# Altium PCB PCIe2HAT.PcbDoc
Units mil, origin at the board's own origin, x right, y up, seen from the top; angles counter-clockwise.
Board outline 3162.2 x 1103.26 mil, 4 copper layers (L01-TOP, L02-GND, L03-GND, L10-BOT), stack 17.5 mil thick; 30 components, 23 nets, 143 pads, 163 vias.
Unrouted connection lines stored in the file: 76.
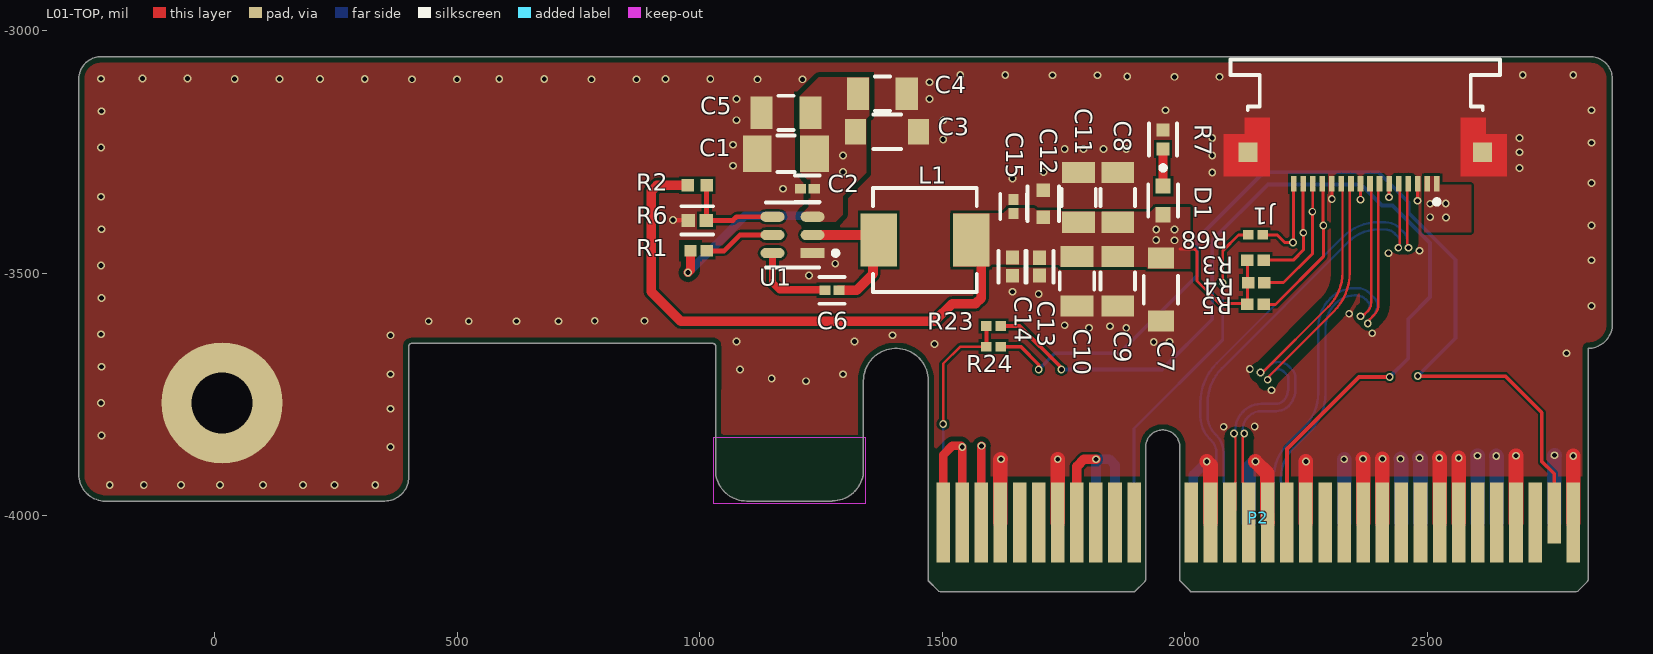
[diagram p0: L01-TOP view]
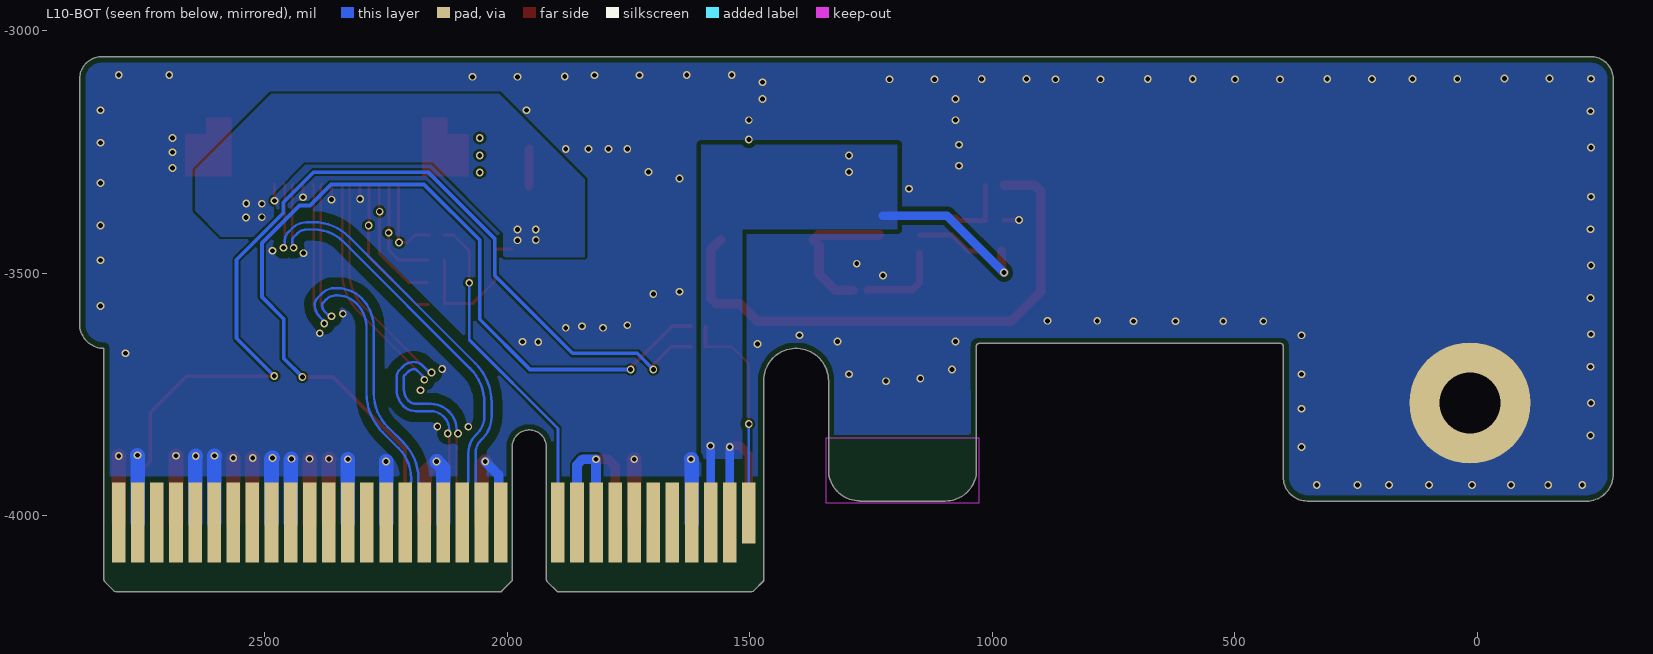
[diagram p1: L10-BOT view, seen from below]
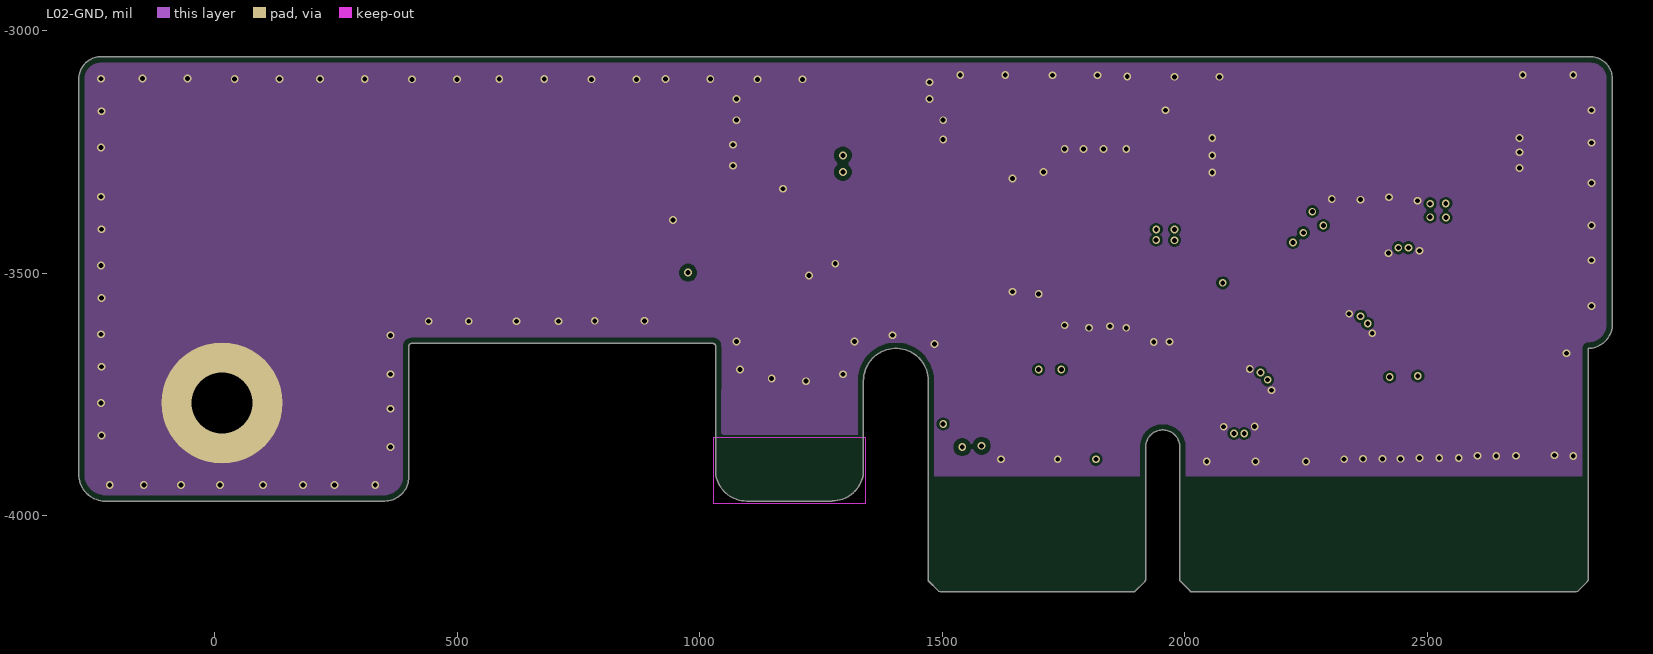
[diagram p2: L02-GND]
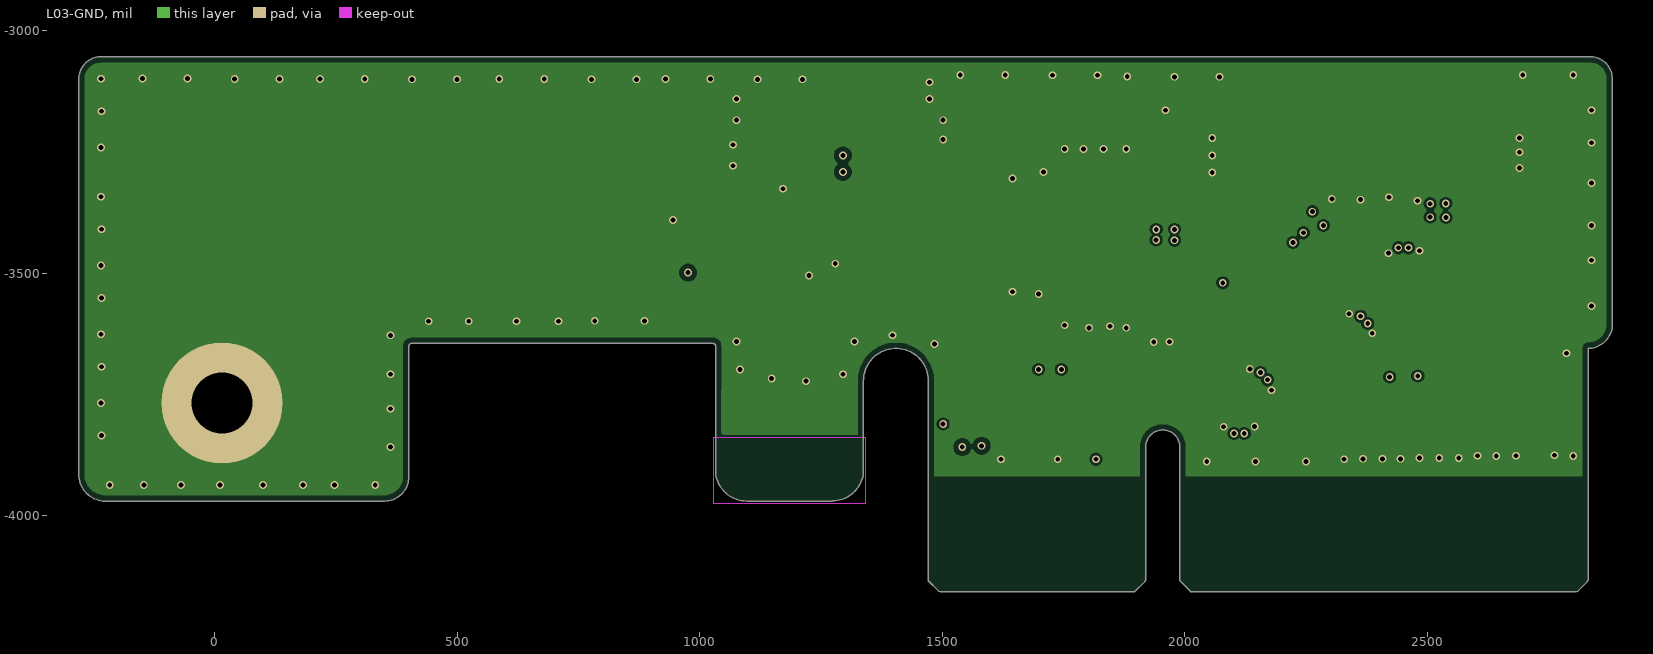
[diagram p3: L03-GND]
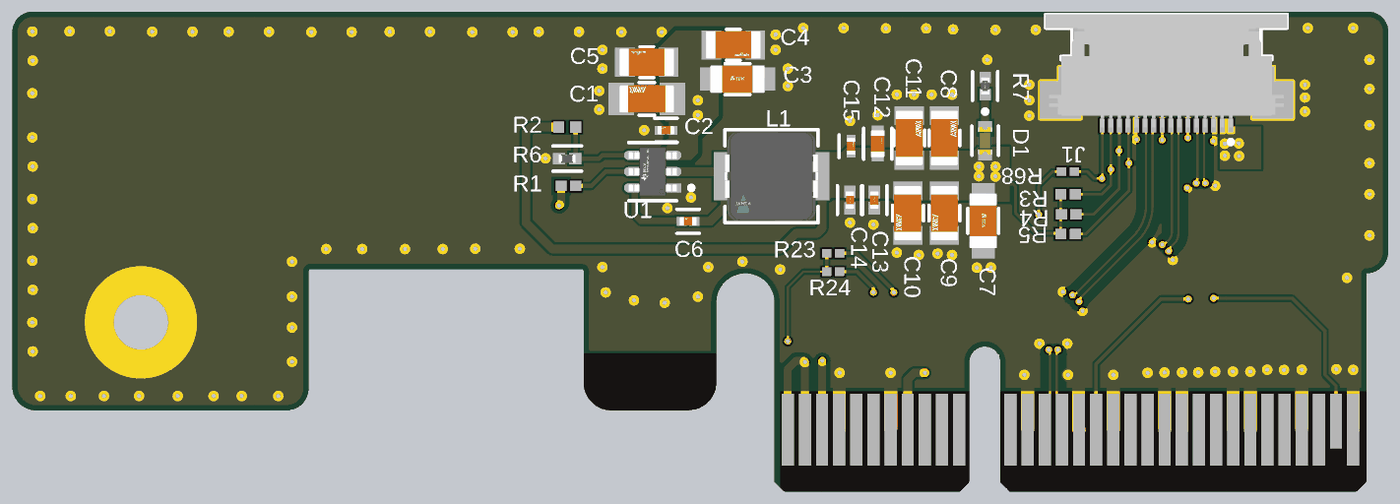
[diagram p4: 3D render of the assembled board from above, using the file's embedded part models]

## Layer stack, top to bottom
Top Solder: solder mask 0.4, Solder Resist, Dk 3.5
L01-TOP: signal copper 0.6
Dielectric 1: prepreg 3.9, FR-4, Dk 4.29
L02-GND: signal copper 0.6
Dielectric3: prepreg 7.3, FR-4, Dk 4.29
L03-GND: signal copper 0.6
Dielectric2: dielectric 3.9, FR-4, Dk 4.8
L10-BOT: signal copper 0.6
Board Layer Stack Bottom Solder: solder mask 0.4, Solder Resist, Dk 3.5

## Board outline
-230.43,-3969.9 350.12,-3969.9 ccw(c350.12,-3919.9) 400.12,-3919.9 400.12,-3650.09 cw(c405.12,-3650.09) 405.12,-3645.09 1027.56,-3645.09 cw(c1027.56,-3650.09) 1032.56,-3650.09 1032.56,-3905.99 1032.44,-3905.99 ccw(c1096.47,-3905.99) 1096.47,-3970.02 1096.47,-3969.9 1273.49,-3969.9 1273.49,-3969.54 ccw(c1273.49,-3905.51) 1337.52,-3905.51 1337.52,-3721.94 cw(c1404.42,-3721.94) 1471.31,-3721.94 1471.22,-3721.98 1471.22,-4134.45 1492.37,-4155.6 1495.9,-4157.06 1896.55,-4157.06 1917.7,-4135.91 1919.18,-4132.36 1919.18,-3858.74 cw(c1954.58,-3858.74) 1989.98,-3858.74 1989.98,-4134.43 2011.12,-4155.56 2011.65,-4157.06 2806.93,-4157.06 2810.48,-4155.58 2830.15,-4135.91 2831.61,-4132.38 2831.61,-3655.09 ccw(c2831.61,-3605.09) 2881.61,-3605.1 2881.61,-3098.8 ccw(c2835.77,-3099.64) 2834.93,-3053.8 -234.59,-3053.8 -233.75,-3053.8 ccw(c-234.59,-3099.64) -280.43,-3098.8 -280.43,-3909.9 ccw(c-225.43,-3914.9)

## Design rules (kind name [scope] priority, off if disabled: settings)
BoardOutlineClearance [All] p1: gap=12 ignorepadtopadclearanceinfootprint=FALSE
Clearance Clearance_12V [InNet('+12V') OR InNet('+12V_PCIE')] p1: gap=10 ignorepadtopadclearanceinfootprint=TRUE
Clearance DiffPairClearance [(InDifferentialPairClass('All Differential Pairs'))] p2: gap=5 ignorepadtopadclearanceinfootprint=TRUE except(20: Arc-Fill Arc-Poly Arc-Region Track-Fill Track-Poly Track-Region)
Clearance Clearance_PCIE [InDifferentialPairClass('PCIE')] p3: gap=5 ignorepadtopadclearanceinfootprint=FALSE
Clearance [All] p4: gap=5 ignorepadtopadclearanceinfootprint=TRUE
ComponentClearance [All] p1: gap=10 collisioncheckmode=3 verticalgap=2 showdistances=FALSE
DiffPairsRouting DiffPair_100ohm [InDifferentialPairClass('All Differential Pairs')] p1: maxlimit=10 minlimit=5 mostfreqgap=10 toplayer_mingap=10 toplayer_minwidth=5 toplayer_maxwidth=5 toplayer_prefwidth=5 bottomlayer_mingap=10 bottomlayer_minwidth=5 bottomlayer_maxwidth=5 bottomlayer_prefwidth=5 impedanceprofiledriven=TRUE impedanceprofileid={54E60DE2-01EA-496C-94D2-6AE08175C5F2} impedanceprofilevalue=100.000000 maxuncoupledlength=500
HoleSize [All] p1: absolutevalues=TRUE maxlimit=1000 minlimit=8 maxpercent=80.000 minpercent=20.000
MatchedLengths SFP_TX_RX [InNetClass('SFP_TX_RX')] p1: tolerance=3 checknetsindiffpair=FALSE checkdiffpairvsdiffpair=TRUE checkxsignals=TRUE checkothers=TRUE
MatchedLengths SMA_Length1 [InNetClass('SMA_Length1')] p2: tolerance=3 checknetsindiffpair=FALSE checkdiffpairvsdiffpair=TRUE checkxsignals=TRUE checkothers=TRUE
MatchedLengths SMA_Length2 [InNetClass('SMA_Length2')] p3: tolerance=3 checknetsindiffpair=FALSE checkdiffpairvsdiffpair=TRUE checkxsignals=TRUE checkothers=TRUE
MatchedLengths SMA_Short [InNetClass('SMA_Short')] p4: tolerance=3 checknetsindiffpair=FALSE checkdiffpairvsdiffpair=TRUE checkxsignals=TRUE checkothers=TRUE
MatchedLengths Loopbacks_TX [InNetClass('Loopbacks_TX')] p5: tolerance=3 checknetsindiffpair=FALSE checkdiffpairvsdiffpair=TRUE checkxsignals=TRUE checkothers=TRUE
MatchedLengths Loopbacks_RX [InNetClass('Loopbacks_RX')] p6: tolerance=3 checknetsindiffpair=FALSE checkdiffpairvsdiffpair=TRUE checkxsignals=TRUE checkothers=TRUE
MatchedLengths DPLL_SFP_TX_RX [InNetClass('DPLL_SFP_TX_RX')] p7: tolerance=3 checknetsindiffpair=FALSE checkdiffpairvsdiffpair=TRUE checkxsignals=TRUE checkothers=TRUE
MatchedLengths DPLL_SMA [InNetClass('DPLL_SMA')] p8: tolerance=3 checknetsindiffpair=FALSE checkdiffpairvsdiffpair=TRUE checkxsignals=TRUE checkothers=TRUE
MinimumSolderMaskSliver [All] p1 off: minsoldermaskwidth=1
PolygonConnect ATX_12V [InComponent('J38')] p1: connectstyle=Relief reliefconductorwidth=40 reliefentries=4 polygonreliefangle="90 Angle" airgapwidth=8
PolygonConnect SMA_GND_1 [(InComponent('J5') OR InComponent('J7') OR InComponent('J13') OR InComponent('AN1') OR InComponent('AN2') OR InComponent('P1')OR InComponent('J9')OR InComponent('P3')OR InComponent('J10')OR InComponent('J11')OR InComponent('J12') OR InComponent('J16') OR InComponent('J17') OR InComponent('J18') OR InComponent('P7'))] p2: connectstyle=Relief reliefconductorwidth=15 reliefentries=4 polygonreliefangle="90 Angle" airgapwidth=10
PolygonConnect [All] p3: connectstyle=Direct reliefconductorwidth=15 reliefentries=4 polygonreliefangle="90 Angle" airgapwidth=8
RoutingVias [All] p1: holewidth=10 width=16 viastyle="Through Hole" minholewidth=8 minwidth=16 maxholewidth=28 maxwidth=50
SilkToSolderMaskClearance [IsPad] p1 off: minsilkscreentomaskgap=10 clearancetoexposedcopper=TRUE
SolderMaskExpansion [All] p1: expansion=4 istentingtop=FALSE
Width [All] p1: maxlimit=80 minlimit=3 preferedwidth=8 toplayer_minwidth=4 toplayer_maxwidth=40 toplayer_prefwidth=6 bottomlayer_minwidth=4 bottomlayer_maxwidth=40 bottomlayer_prefwidth=6 impedanceprofiledriven=TRUE impedanceprofileid={01EEFB83-325C-4167-8E9D-E60E7E24A12D} impedanceprofilevalue=50.000000 minimp=50.000000 maximp=50.000000 favimp=50.000000
25 further rules are at their usual default settings.

## Classes and differential pairs
differential pair PCIE_PI_GF_0: +PCIE_PI_GF_0_P -PCIE_PI_GF_0_N
differential pair PCIE_GF_PI_0: +PCIE_GF_PI_0_P -PCIE_GF_PI_0_N
differential pair PCIE_CLK: +PCIE_CLK_P -PCIE_CLK_N

## Components (designator, comment, footprint, x,y, rotation, side; value= is the part's Value field where it differs from the comment)
C1 "10uF_25V_1206" FP-1206-L_3_2_0_2-W_1_6_0-IPC_A 1177.66,-3254.02 r180 top
C2 "0.1uF_25V_0402" FP-0402-L_1_0_1-W_0_5_0_1-IPC_C 1221.68,-3326.09 r180 top
C3 "47uF_25V_1206" FP-C3216-160-0_2-MFG 1386.05,-3208.66 r0 top
C4 "4.7uF_50V_1206" FP-GRM31C-0_2-e0_3_0_8-IPC_C 1376.53,-3129.92 r0 top
C5 "4.7uF_50V_1206" FP-GRM31C-0_2-e0_3_0_8-IPC_C 1177.66,-3169.63 r180 top
C6 "0.1uF_25V_0402" FP-0402-L_1_0_1-W_0_5_0_1-IPC_C 1272.49,-3535.44 r180 top
C7 "47uF_16V_1206" FP-C3216-160-0_2-MFG 1950.69,-3534.26 r270 top
C8 "22uF_6.3V_1206" FP-1206-L_3_2_0_2-W_1_6_0-IPC_C 1861.69,-3343.9 r90 top
C9 "22uF_6.3V_1206" FP-1206-L_3_2_0_2-W_1_6_0-IPC_C 1861.69,-3516.6 r270 top
C10 "22uF_6.3V_1206" FP-1206-L_3_2_0_2-W_1_6_0-IPC_C 1777.73,-3516.6 r270 top
C11 "22uF_6.3V_1206" FP-1206-L_3_2_0_2-W_1_6_0-IPC_C 1780.92,-3343.9 r90 top
C12 "10uF_16V_0603" FP-0603-L_1_6_0_2-W_0_8_0-MFG 1708.49,-3357.03 r90 top
C13 "2.2uF_16V_0402" FP-C1005-050-0_05-IPC_A 1700.47,-3486.66 r270 top
C14 "1uF_16V_0402" FP-0402-L_1_0_0_05-W_0_5-IPC_A 1644.67,-3486.66 r270 top
C15 "0.1uF_25V_0402" FP-0402-L_1_0_1-W_0_5_0_1-IPC_C 1647.1,-3362.9 r90 top
D1 "LTST-C191KGKT" FP-LTST-C191KGKT-MFG 1955.27,-3350.09 r270 top
J1 "52746-1671" MOLX-52746-1671 2372.11,-3283.27 r180 top locked
L1 "IHLP2020CZER3R3M11" FP-IHLP-2020CZ-FP_1_905x2-MFG 1464.25,-3431.74 r180 top
P2 "PCIex4" PCIE_4LANE_EDGE 2151.41,-3907.03 r0 top
R1 "4.7K_1%_0402" RESC1005X40X25NL10T10 997.54,-3454.14 r180 top
R2 "54.9K_1%_0402" RESC1005X40X25ML05T05 994.7,-3318.9 r180 top
R3 "4.7K_1%_0402" RESC1005X40X25NL10T10 2145.73,-3473.32 r180 top
R4 "4.7K_1%_0402" RESC1005X40X25NL10T10 2147.33,-3519.58 r180 top
R5 "4.7K_1%_0402" RESC1005X40X25NL10T10 2145.73,-3564.52 r180 top
R6 "10K_1%_0402" FP-ERJU02-IPC_A 994.7,-3391.27 r0 top
R7 "200_1%_0402" FP-ERJ2RK-IPC_A 1955.27,-3224.41 r270 top
R23 "0_5%_0402" RESC1005X40X25LL10T10 1605.92,-3609.06 r0 top
R24 "0_5%_0402" RESC1005X40X25LL10T10 1605.92,-3651.41 r0 top
R68 "0_5%_0402" RESC1005X40X25LL10T10 2145.73,-3421.26 r0 top
U1 "TPS564208DDCT" FP-DDC0006A-IPC_C 1191.31,-3421.26 r180 top

## Footprints (in the part's own frame and the unit in brackets; to place one, negate y for a bottom-side part, rotate by r counter-clockwise, add the part's x,y. Pads: shape width x height; smd on the part's side, far side on the other; paste and mask are expansions set on the pad)
FP-0402-L_1_0_0_05-W_0_5-IPC_A [mil]
  rect 28.16x26.48 smd paste+0 mask+0: 1(-18.84,0) 2(18.84,0)
  silkscreen extent -33,-29 33,29, body extent -20,-10 20,10, height 22
FP-0402-L_1_0_1-W_0_5_0_1-IPC_C [mil]
  rect 22.88x20.16 smd paste+0 mask+0: 1(-14.39,0) 2(14.39,0)
  silkscreen extent -26,-28 26,28, body extent -30,-16 30,16, height 10
FP-0603-L_1_6_0_2-W_0_8_0-MFG [mm]
  rect 0.7x0.7 smd paste+0 mask+0: 1(-0.7,0) 2(0.7,0)
  silkscreen extent -0.9,-0.82 0.9,0.82, body extent -1.15,-0.6 1.15,0.6, height 0.25
FP-1206-L_3_2_0_2-W_1_6_0-IPC_A [mil]
  rect 59.24x75.05 smd paste+0 mask+0: 1(-59.09,0) 2(59.09,0)
  silkscreen extent -18,-38 18,38, body extent -108,-57 108,57, height 10
FP-1206-L_3_2_0_2-W_1_6_0-IPC_C [mil]
  rect 43.49x67.17 smd paste+0 mask+0: 1(-51.21,0) 2(51.21,0)
  silkscreen extent -18,-35 18,35, body extent -63,-31 63,31, height 90
FP-C1005-050-0_05-IPC_A [mil]
  rect 29.11x26.48 smd paste+0 mask+0: 1(-18.37,0) 2(18.37,0)
  silkscreen extent -33,-29 33,29, body extent -20,-10 20,10, height 22
FP-C3216-160-0_2-MFG [mm]
  rect 1.1x1.35 smd paste+0 mask+0: 1(-1.65,0) 2(1.65,0)
  silkscreen extent -0.72,-0.9 0.72,0.9, body extent -2.3,-1 2.3,1, height 0.25
FP-DDC0006A-IPC_C [mm]
  rect 1.254x0.532 smd paste+0 mask+0: 1(-1.05,0.95)
  rrect100% 1.254x0.532 smd paste+0 mask+0: 2(-1.05,0) 3(-1.05,-0.95) 4(1.05,-0.95) 5(1.05,0) 6(1.05,0.95)
  silkscreen extent -2.38,-1.7 1.4,1.7, body extent -1.4,-1.45 1.4,1.45, height 1.1
FP-ERJ2RK-IPC_A [mil]
  rect 26.31x26.48 smd paste+0 mask+0: 1(-19.77,0) 2(19.77,0)
  silkscreen extent -33,-29 33,29, body extent -41,-21 41,21, height 10
FP-ERJU02-IPC_A [mil]
  rect 28.16x26.48 smd paste+0 mask+0: 1(-18.84,0) 2(18.84,0)
  silkscreen extent -33,-29 33,29, body extent -20,-10 20,10, height 16
FP-GRM31C-0_2-e0_3_0_8-IPC_C [mil]
  rect 45.46x67.17 smd paste+0 mask+0: 1(-50.23,0) 2(50.23,0)
  silkscreen extent -16,-35 16,35, body extent -77,-39 77,39, height 10
FP-IHLP-2020CZ-FP_1_905x2-MFG [mm]
  rect 1.905x2.79 smd paste+0 mask+0: 1(-2.425,0) 2(2.425,0)
  silkscreen extent -2.72,-2.72 2.72,2.72, body extent -3.48,-2.82 3.48,2.82, height 0.25
FP-LTST-C191KGKT-MFG [mm]
  rect 0.8x0.8 smd paste+0 mask+0: 1(-0.75,0) 2(0.75,0)
  silkscreen extent -1.82,-0.77 0.85,0.77, body extent -1.25,-0.55 1.25,0.55, height 0.25
MOLX-52746-1671 [mm] "FPC Connector, 16-Leads, Right Angle, Pitch 0.5 mm, Mated Height 2.0 mm, SMT"
  rect 0.3x0.8 smd: 1(-3.75,0.824) 2(-3.25,0.824) 3(-2.75,0.824) 4(-2.25,0.824) 5(-1.75,0.824) 6(-1.25,0.824) 7(-0.75,0.824) 8(-0.25,0.824) 9(0.25,0.824) 10(0.75,0.824) 11(1.25,0.824) 12(1.75,0.824) 13(2.25,0.824) 14(2.75,0.824) 15(3.25,0.824) 16(3.75,0.824)
  rect 1x1 smd: MP1(-6.134,-0.824) MP2(6.134,-0.824)
  L01-TOP region: -7.4,0.424 -5,0.424 -5,-2.626 -5,-2.626 -6.3,-2.626 -6.3,-1.777 -6.3,-1.776 -7.4,-1.776
  L01-TOP region: 5,0.424 7.4,0.424 7.4,-1.776 7.4,-1.777 6.3,-1.777 6.3,-2.626 5,-2.626 5,0.424
  silkscreen extent -7.05,-5.68 7.05,1.9, body extent -7.05,-5.68 7.05,0.92, height 2.01
PCIE_4LANE_EDGE [mil] "PCIE_4LANE_EDGE"
  rect 28x126 smd far side: A1(-649.6,-87.74)
  rect 28x165 smd far side: A2(-610.23,-107.24) A3(-570.86,-107.24) A4(-531.49,-107.24) A5(-492.12,-107.24) A6(-452.75,-107.24) A7(-413.38,-107.24) A8(-374.01,-107.24) A9(-334.64,-107.24) A10(-295.27,-107.24) A11(-255.9,-107.24) A12(-137.79,-107.24) A13(-98.42,-107.24) A14(-59.05,-107.24) A15(-19.68,-107.24) A16(19.69,-107.24) A17(59.06,-107.24) A18(98.43,-107.24) A19(137.8,-107.24) A20(177.17,-107.24) A21(216.54,-107.24) A22(255.91,-107.24) A23(295.28,-107.24) A24(334.65,-107.24) A25(374.02,-107.24) A26(413.39,-107.24) A27(452.76,-107.24) A28(492.13,-107.24) A29(531.5,-107.24) A30(570.87,-107.24) A31(610.24,-107.24) A32(649.61,-107.24)
  rect 28x165 smd: B1(-649.6,-107.24) B2(-610.23,-107.24) B3(-570.86,-107.24) B4(-531.49,-107.24) B5(-492.12,-107.24) B6(-452.75,-107.24) B7(-413.38,-107.24) B8(-374.01,-107.24) B9(-334.64,-107.24) B10(-295.27,-107.24) B11(-255.9,-107.24) B12(-137.79,-107.24) B13(-98.42,-107.24) B14(-59.05,-107.24) B15(-19.68,-107.24) B16(19.69,-107.24) B17(59.06,-107.24) B18(98.43,-107.24) B19(137.8,-107.24) B20(177.17,-107.24) B21(216.54,-107.24) B22(255.91,-107.24) B23(295.28,-107.24) B24(334.65,-107.24) B25(374.02,-107.24) B26(413.39,-107.24) B27(452.76,-107.24) B28(492.13,-107.24) B29(531.5,-107.24) B30(570.87,-107.24) B32(649.61,-107.24)
  rect 28x126 smd: B31(610.24,-87.74)
RESC1005X40X25LL10T10 [mm] "Chip Resistor, 2-Leads, Body 1.00x0.50mm, IPC High Density"
  rect 0.55x0.5 smd: 1(-0.375,0) 2(0.375,0)
  body extent -0.55,-0.3 0.55,0.3, height 0.4
RESC1005X40X25ML05T05 [mm] "Chip Resistor, 2-Leads, Body 1.00x0.50mm, IPC Low Density"
  rect 0.65x0.65 smd: 1(-0.5,0) 2(0.5,0)
  body extent -0.53,-0.27 0.53,0.28, height 0.4
RESC1005X40X25NL10T10 [mm] "Chip Resistor, 2-Leads, Body 1.00x0.50mm, IPC Medium Density"
  rect 0.65x0.6 smd: 1(-0.425,0) 2(0.425,0)
  body extent -0.55,-0.3 0.55,0.3, height 0.4

## Part data
C1: library part CMP-04427-006943-1, "General Purpose Ceramic Capacitor, 1206, 10uF, 20%, X5R, 15%, 25V", Capacitance=10uF, Case Code (Imperial)=1206, Case Code (Metric)=3216, Dielectric=X5R, Insulation Resistance=10GR, Max Operating Temperature=85°C, Min Operating Temperature=-55°C, Package Quantity=1, Tolerance=20%, Voltage Rating=25V, Case/Package=1206, Construction=Flat, Contact Plating=Tin, Depth=1.6mm, Dissipation Factor=12.5%, Height=0.07mm, Lead Free="Lead Free", Length=3.2mm, Mount="Surface Mount", Number of Pins=2, Packaging="Tape and Reel", Radiation Hardening=No, REACH SVHC="No SVHC", RoHS Compliant=Yes, Series=-, Termination=SMD/SMT, Thickness=0.07inch, Voltage Rating (DC)=25V, Width=1.6mm
C2 C6 C15: library part CMP-2008-02519-2, "General Purpose Ceramic Capacitor, 0402, 100nF, 10%, X7R, 15%, 25V", Capacitance=100nF, Case Code (Imperial)=0402, Case Code (Metric)=1005, Dielectric=X7R, Max Operating Temperature=125°C, Min Operating Temperature=-55°C, Package Quantity=1, Tolerance=10%, Voltage=25V, Case/Package=0402, Construction=Flat, Depth=0.5mm, Lead Free="Lead Free", Length=1mm, Mount="Surface Mount", Number of Pins=2, Packaging="Tape and Reel", Radiation Hardening=No, REACH SVHC="No SVHC", RoHS Compliant=Yes, Series=-, Termination=SMD/SMT, Thickness=0.022inch, Voltage Rating=25V, Voltage Rating (DC)=25V, Width=0.02inch
C3: library part CMP-2000-05397-3, "Multilayer Ceramic Capacitors 47uF ±20% 25V X5R SMD 1206", Capacitance=47uF, Case Code (Imperial)=1206, Case Code (Metric)=3216, Dielectric=X5R, Dielectric Material=Ceramic, Max Operating Temperature=85°C, Min Operating Temperature=-55°C, Package Quantity=1, Tolerance=20%, Voltage=25V, Case/Package=1206, Depth=1.6mm, Height=1.6mm, Lead Free="Lead Free", Length=0.126inch, Mount="Surface Mount", Packaging="Tape and Reel", REACH SVHC="No SVHC", Resistor Type=Ceramic, RoHS Compliant=Yes, Series=C, Termination=SMD/SMT, Thickness=0.071inch, Voltage Rating=25V, Voltage Rating (DC)=25V, Weight=0.000571oz, Width=0.063inch
C4 C5: library part CMP-1037-04923-3, "Chip Multilayer Ceramic Capacitors for General Purpose, 1206, 4.7uF, X7R, 15%, 10%, 50V", Capacitance=4.7uF, Case Code (Imperial)=1206, Case Code (Metric)=3216, Dielectric=X7R, Max Operating Temperature=125°C, Min Operating Temperature=-55°C, Package Quantity=2000, Tolerance=10%, Voltage=50V, Case/Package=1206, Depth=1.6mm, Height=1.6mm, Lead Free="Lead Free", Length=3.2mm, Material=Ceramic, Mount="Surface Mount", Packaging="Tape and Reel", Radiation Hardening=No, REACH SVHC="No SVHC", Termination=SMD/SMT, Thickness=0.071inch, Voltage Rating=50V, Voltage Rating (DC)=50V, Width=0.063inch
C7: library part CMP-2000-07442-2, "Multilayer Ceramic Capacitors 47uF ±20% 16V X5R SMD 1206", Capacitance=47uF, Case Code (Imperial)=1206, Case Code (Metric)=3216, Dielectric=X5R, Dielectric Material=Ceramic, Max Operating Temperature=85°C, Min Operating Temperature=-55°C, Package Quantity=1, Tolerance=20%, Voltage Rating=16V, Case/Package=1206, Construction=Flat, Depth=1.6mm, Height=1.6mm, Lead Free="Lead Free", Length=3.2mm, Mount="Surface Mount", Packaging="Tape and Reel", Radiation Hardening=No, REACH SVHC="No SVHC", Resistor Type=Ceramic, RoHS Compliant=Yes, Series=C, Termination=SMD/SMT, Thickness=0.071inch, Voltage Rating (DC)=16V, Weight=0.000571oz, Width=0.063inch
C8 C9 C10 C11: library part CMP-2000-05869-2, "General Purpose Ceramic Capacitor, 1206, 22uF, 20%, X5R, 15%, 6.3V", Capacitance=22uF, Case Code (Imperial)=1206, Case Code (Metric)=3216, Dielectric=X5R, Max Operating Temperature=85°C, Min Operating Temperature=-55°C, Package Quantity=1, Tolerance=20%, Voltage=6.3V, Case/Package=1206, Construction=Flat, Contact Plating=Tin, Depth=1.6mm, Height=0.07mm, Lead Free="Lead Free", Length=3.2mm, Mount="Surface Mount", Number of Pins=2, Packaging="Tape and Reel", Radiation Hardening=No, REACH SVHC="No SVHC", RoHS Compliant=Yes, Series=-, Termination=SMD/SMT, Thickness=0.07inch, Voltage Rating=6.3V, Voltage Rating (DC)=6.3V, Width=0.063inch
C12: library part CMP-2000-06226-4, "Multilayer Ceramic Capacitor 10uF 16V X5R 20% SMD 0603 T/R", Capacitance=10uF, Case Code (Imperial)=0603, Case Code (Metric)=1608, Dielectric=X5R, Max Operating Temperature=85°C, Min Operating Temperature=-55°C, Package Quantity=1, Tolerance=20%, Voltage Rating=16V, Case/Package=0603, Construction=Flat, Halogen Free="Halogen Free", Height=0.8mm, Length=0.063inch, Mount="Surface Mount", Packaging="Tape and Reel", RoHS Compliant=Yes, Series=M, Termination=SMD/SMT, Thickness=0.031inch, Voltage Rating (DC)=16V, Width=0.031inch
C13: library part CMP-2000-05998-2, "Multilayer Ceramic Capacitors 2.2μF ±10% 16V X5R SMD 0402", Capacitance=2.2uF, Case Code (Imperial)=0402, Case Code (Metric)=1005, Dielectric=X5R, Dielectric Material=Ceramic, Max Operating Temperature=85°C, Min Operating Temperature=-55°C, Package Quantity=1, Tolerance=10%, Voltage Rating=16V, Case/Package=0402, Depth=0.5mm, Height=0.5mm, Lead Free="Lead Free", Length=1mm, Mount="Surface Mount", Packaging="Tape and Reel", REACH SVHC="No SVHC", Resistor Type=Ceramic, RoHS Compliant=Yes, Series=C, Termination=SMD/SMT, Thickness=0.022inch, Voltage Rating (DC)=16V, Weight=2.3E-05oz, Width=0.02inch
C14: library part CMP-14477-000104-2, "None", Capacitance=1uF, Case Code (Imperial)=0402, Case Code (Metric)=1005, Dielectric=X5R, Max Operating Temperature=85°C, Min Operating Temperature=-55°C, Package Quantity=1, Tolerance=10%, Voltage Rating=16V, Case/Package=0402, Construction=Flat, Depth=0.5mm, Halogen Free="Halogen Free", Height=0.5mm, Length=1mm, Mount="Surface Mount", Number of Pins=2, Packaging="Tape and Reel", Radiation Hardening=No, RoHS Compliant=Yes, Series=M, Termination=SMD/SMT, Thickness=0.022inch, Voltage Rating (DC)=16V, Width=0.02inch
D1: library part CMP-2000-05198-2, "LED GREEN CLEAR SMD", Case Code (Imperial)=0603, Case Code (Metric)=1608, Color=Green, Forward Current=30mA, Forward Voltage=2V, Lens Color=Colorless, Max Operating Temperature=85°C, Max Power Dissipation=75mW, Min Operating Temperature=-55°C, Package Quantity=1, Reverse Voltage=5V, Test Current=20mA, Case/Package=0603, Depth=0.8mm, Dominant Wavelength=571nm, Height=0.55mm, Illumination Color=Green, Lead Free="Lead Free", Length=1.6mm, Lens Style=Rectangular, Lens Transparency=Clear, Luminous Intensity=35mcd, Mount="Surface Mount", Number of Elements=1, Number of LEDs=1, Number of Pins=2, Packaging="Tape and Reel", Power Dissipation=75mW, Power Rating=75mW, Radiation Hardening=No, Viewing Angle=130°, Wavelength=574nm, Width=0.8mm
J1: library part CMP-1241-00378-1, "0.5 mm Pitch Easy-On(TM) Type FPC Connector, 2.0 mm Mated Height, Right Angle, ZIF, SMT, Bottom Contact, 16 Circuits, -20 to 85 degC, ELV and RoHS Compliant, Tape and Reel", Current (Max per Contact)=0.5A, Manufacturer=Molex, Voltage (Max)=50V, Circuits (Loaded)=16, ComponentLink1Description="Manufacturer URL", ComponentLink1URL=http://www.molex.com/molex/index.jsp, ComponentLink2Description=Datasheet, ComponentLink2URL=http://www.molex.com/webdocs/datasheets/pdf/en-us/0527461671_FFC_FPC_CONNECTORS.pdf, ComponentLink3Description="Package Specification", ComponentLink3URL=http://www.molex.com/pdm_docs/sd/527461671_sd.pdf, Contact Position=Bottom, Durability (mating cycles max)=20, Entry Angle="90degrees Angle", Mated Height=2.00mm, Material - Metal="Phosphor Bronze", Material - Plating Mating=Gold, Material - Plating Termination=Gold, Mounting Technology="Surface Mount", Number of Rows=1, Orientation="Right Angle", PackageDescription="16-Lead FPC Connector, Pitch 0.5 mm", PackageReference=52746-1671, PackageVersion="Rev. H, 05/2009", Packing="Tape and Reel", PartNumber=52746-1671, PCB Locator=No, PCB Retention=Yes, Pitch - Mating Interface=0.50mm, Polarized to PCB=Yes, RoHS=TRUE, Stackable=No
L1: library part CMP-02424-000463-1, "Fixed Inductors Commercial Low DCR Series 3.3uH 5.5A 40.4mΩ 20%", Case/Package=2020, Current Rating=5.5A, DC Resistance (DCR)=40.4mR, Inductance=3.3uH, Inductance Tolerance=20%, Max DC Current=7A, Max Operating Temperature=125°C, Min Operating Temperature=-55°C, Package Quantity=2000, Self Resonant Frequency=29MHz, Test Frequency=100kHz, Contact Plating=Tin, Depth=5.43mm, Height=3mm, Height - Seated (Max)=0.118inch, Lead Free="Lead Free", Length=5.74mm, Military Standard=Not, Mount="Surface Mount", Packaging="Tape and Reel", Radiation Hardening=No, RMS Current (Irms)=5.5A, Saturation Current=7A, Shielding=Shielded, Termination=SMD/SMT, Tolerance=20%, Width=0.204inch
P2: "PCIE x4 Edge Connector,OrCAD Symbol,NC", Manufacturer=NA, Part Number=451, NOTE=NC, Part Type=SMT, Vendor P/N=NA
R1 R3 R4 R5: library part CMP-2002-05217-1, Manufacturer=Bourns, Part Number=CR0402-FX-4701GLF
R2: library part CMP-2002-00991-1, Manufacturer=Panasonic, Part Number=ERJ-2RKF5492X
R6: library part CMP-2002-06460-3, "RES 10K OHM 1% 1/10W 0402 SMD", Case Code (Imperial)=0402, Case Code (Metric)=1005, Current Rating=1A, Max Operating Temperature=155°C, Min Operating Temperature=-55°C, Package Quantity=10000, Power Rating=100mW, Resistance=10kR, Resistance Tolerance=1%, Resistor Type="Thick Film", Temperature Coefficient=200ppm/°C, Voltage Rating=50V, Case/Package=0402, Height=0.35mm, Length=1mm, Mount="Surface Mount", Packaging="Tape and Reel", Radiation Hardening=No, RoHS Compliant=Yes, Series=ERJ-U02, Termination=SMD/SMT, Tolerance=1%, Voltage Rating (DC)=50V, Weight=2.8E-05oz, Width=0.5mm
R7: library part CMP-2002-00757-2, "RES SMD 200 OHM 1% 1/10W 0402", Case Code (Imperial)=0402, Case Code (Metric)=1005, Max Operating Temperature=155°C, Max Power Dissipation=100mW, Min Operating Temperature=-55°C, Package Quantity=1, Resistance=200R, Resistance Tolerance=1%, Resistor Type="Thick Film", Temperature Coefficient=100ppm/°C, Voltage Rating=50V, Case/Package=0402, Construction=Rectangular, Contact Plating=Tin, Depth=0.5mm, Features="Automotive AEC-Q200", Height=0.35mm, Lead Free="Lead Free", Length=1mm, Military Standard=Not, Mount="Surface Mount", Number of Terminations=2, Packaging="Tape and Reel", Power Rating=100mW, Radiation Hardening=No, REACH SVHC="No SVHC", RoHS Compliant=Yes, Series=ERJ, Size Code=0402, Technology="THICK FILM", Termination=SMD/SMT, Tolerance=1%, Voltage Rating (DC)=50V, Width=0.02inch
R23 R24 R68: library part CMP-2002-04569-1, Manufacturer="KOA Speer", Part Number=RK73Z1ETTP
U1: library part CMP-04918-000684-1, "IC REG BUCK ADJ 4A TSOT23-6", Case/Package=SOT-23-6, Max Input Voltage=17V, Max Operating Temperature=125°C, Max Output Voltage=7V, Min Input Voltage=4.5V, Min Operating Temperature=-40°C, Min Output Voltage=760mV, Output Current=4A, Quiescent Current=400uA, Switching Frequency=560kHz, Lead Free="Lead Free", Mount="Surface Mount", Number of Outputs=1, Number of Pins=6, Output Configuration=Positive, Output Type=Adjustable, Output Voltage=7V, Packaging="Cut Tape", REACH SVHC="No SVHC", RoHS Compliant=Yes, Synchronous Rectifier=Yes

## Free pads (board coordinates)
  round 250 hole 125.2: MH1(15.02,-3767.72)

## Via types
v1: diameter 16, hole 10, L01-TOP to L10-BOT, 163 vias

## Nets (pads, with @x,y where several pads share a name; then routed paths per layer and width w, separated by ;. In a path a pad name is that pad's centre, name@x,y a point inside that pad or via, vN(x,y) a via of type N, cw(c..) or ccw(c..) an arc to the next point about the centre after c; other vN are vias at no path point)
+12V_PCIE: C1.1 C2.1 C3.1 C4.1 C5.1 P2.A2 P2.A3 P2.B1 P2.B2 P2.B3 R1.2 U1.3 | length 1159.7
  L01-TOP w18: v1(975.86,-3498.95) 980.8,-3494 R1.2 ; P2.B1 1501.81,-3875 1520.63,-3856.18 1538.62,-3856.18 v1(1541.18,-3858.74) P2.B2 ; P2.B3 1580.55,-3856.7 v1(1581.07,-3856.18)
  L10-BOT w18: v1(975.86,-3498.95) 1093.11,-3381.69 1225.01,-3381.69 ; P2.A2 v1(1541.18,-3858.74) ; P2.A3 1580.55,-3856.7 v1(1581.07,-3856.18)
  other v1: 1295.02,-3291.55 1295.02,-3257.33
GND: C1.2 C2.2 C3.2 C4.2 C5.2 C7.2 C8.2 C9.2 C10.2 C11.2 C12.2 C13.2 C14.2 C15.2 J1.3 J1.6 J1.9 J1.12 J1.MP1 J1.MP2 P2.A4 P2.A12 P2.A15 P2.A18 P2.A20 P2.A23 P2.A24 P2.A27 P2.A28 P2.A31 P2.B4 P2.B7 P2.B13 P2.B16 P2.B18 P2.B21 P2.B22 P2.B25 P2.B26 P2.B29 P2.B32 pad.MH1 R6.1 R7.1 U1.1 | length 2955.1
  L01-TOP w6: v1(2303.21,-3347.18) J1.12 ; v1(2362.27,-3348.51) J1.9 ; v1(2421.2,-3343.45) 2421.26,-3343.39 2421.26,-3315.75 J1.6 ; v1(2479.65,-3350.81) 2480.01,-3350.45 2480.01,-3316.05 J1.3
  L01-TOP w10: v1(944.88,-3390.64) 945.2,-3390.95 975.54,-3390.95 R6.1
  L01-TOP w30: P2.B4 1619.92,-3884.6 v1(1620.81,-3883.72) ; P2.B7 v1(1738.03,-3883.72) ; v1(2045.3,-3888.44) 2052.99,-3896.13 P2.B13 ; v1(2145.73,-3888.44) 2170.1,-3912.81 2170.1,-4013.27 P2.B16 ; P2.B18 v1(2249.84,-3888.44) ; v1(2367.51,-3882.93) 2367.95,-3883.37 P2.B21 ; P2.B22 2407.32,-3883.15 v1(2407.54,-3882.93) ; v1(2524.67,-3880.97) 2525.43,-3881.73 P2.B25 ; P2.B26 v1(2564.8,-3880.97) ; P2.B29 v1(2682.91,-3876.64) ; P2.B32 v1@2801.02,-3877.07
  L10-BOT w20: P2.A12 2017.62,-4010.27 2017.62,-3916.12 v1(2045.3,-3888.44)
  L10-BOT w30: P2.A4 1619.92,-3884.6 v1(1620.81,-3883.72) ; P2.A15 2131.73,-3902.44 v1(2145.73,-3888.44) ; P2.A18 v1(2249.84,-3888.44) ; P2.A20 v1(2328.58,-3883.72) ; v1(2444.96,-3882.93) 2446.69,-3884.66 P2.A23 ; v1(2483.96,-3880.97) 2486.06,-3883.07 P2.A24 ; v1(2603.56,-3876.64) 2604.17,-3877.25 P2.A27 ; v1(2642.12,-3877.03) 2643.54,-3878.46 P2.A28 ; P2.A31 2761.65,-3876.31 v1(2762.5,-3875.46)
  other v1: -216.54,-3937.01 -146.28,-3937.01 -69.85,-3937.01 10.77,-3937.01 99.63,-3937.01 182.02,-3937.01 246.65,-3937.01 330.71,-3937.01 2801.05,-3877.03 362.2,-3858.27 -233.75,-3834.65 2080.1,-3816.78 2144.08,-3816.47 362.2,-3779.53 -234.59,-3767.72 2178.95,-3741.47 1218.73,-3722.78 1148.19,-3717.11 362.2,-3708.66 1295.02,-3708.66 1083.14,-3698.82 2134.19,-3697.54 -233.75,-3692.91 2787.02,-3665.35 1484.15,-3646.19 1936.09,-3641.96 1968.5,-3641.57 1075.73,-3640.73 1318.88,-3640.73 362.2,-3628.26 1397.47,-3628.11 -234.59,-3625.98 2386.44,-3624.04 1802.77,-3612.83 1879.17,-3612.83 1846.01,-3609.7 1752.34,-3607.46 440.94,-3599.22 523.62,-3599.22 622.05,-3599.22 708.66,-3599.22 783.46,-3598.43 885.83,-3598.43 2338.92,-3583.71 2838.58,-3567.81 -233.75,-3551.18 1698.66,-3542.97 1644.67,-3538.53 1225.01,-3505.03 -234.59,-3484.25 1279.34,-3480.51 2838.58,-3473.32 2419.87,-3458.82 2483.96,-3453.74 -233.75,-3409.45 2838.58,-3401.81 -234.59,-3342.52 1171.58,-3326.01 2838.58,-3314.43 1644.67,-3304.81 2056.74,-3292.69 1708.49,-3291.55 2690.35,-3283.16 1068.33,-3278.63 2056.74,-3257.33 2690.35,-3250.85 1752.34,-3244.1 1791.4,-3244.18 1832.22,-3244.1 1879.17,-3244.18 -234.59,-3241 1068.33,-3235.43 2838.58,-3231.16 1501.81,-3224.41 2056.74,-3221.33 2690.35,-3221.33 1075.73,-3184.56 1501.81,-3184.56 -233.75,-3166.2 1960.19,-3164.12 2838.58,-3164.12 1075.73,-3141.25 1473.66,-3141.25 1473.66,-3106.3 40.96,-3099.64 133.56,-3099.64 216.72,-3099.64 309.32,-3099.64 406.75,-3100.49 499.35,-3100.49 586.61,-3099.64 679.22,-3099.64 776.64,-3100.49 869.25,-3100.49 929.13,-3099.64 1021.74,-3099.64 1119.16,-3100.49 1211.77,-3100.49 -234.59,-3099.27 -149.07,-3098.8 -56.47,-3098.8 1978.94,-3095.33 2071.54,-3095.33 1881.51,-3094.49 1727.21,-3092.13 1819.82,-3092.13 1537.19,-3091.28 1629.79,-3091.28 2696.91,-3091.27 2801.02,-3091.28
NetC6_1: C6.1 L1.2 U1.2 | length 299.4
  L01-TOP w20: U1.2 1358.28,-3421.26 L1.2 1357.28,-3443.21 1357.28,-3501.42 1323.27,-3535.44 C6.1
NetC6_2: C6.2 U1.6 | length 175.9
  L01-TOP w15: U1.6 1149.96,-3520.04 1164.18,-3534.26 1256.92,-3534.26 C6.2
NetD1_1: D1.1 R7.2 | length 76.4
  L01-TOP w18: D1.1 R7.2
NetJ1_13: J1.13 R5.1 | length 315.2
  L01-TOP w6: R5.1 2187.19,-3564.52 2285.67,-3466.04 v1(2285.67,-3401.81) 2284.6,-3400.74 2284.6,-3316.76 J1.13
NetJ1_14: J1.14 R4.1 | length 268.5
  L01-TOP w6: R4.1 2203.74,-3519.58 2263.05,-3460.27 v1(2263.05,-3373.26) 2263.84,-3372.48 J1.14
NetJ1_15: J1.15 R3.1 | length 227.5
  L01-TOP w6: R3.1 2223.59,-3473.32 2244.44,-3452.48 v1(2244.44,-3416.7) 2244.16,-3416.42 J1.15
NetP2_A11: P2.A11 R68.1 | length 702.3
  L01-TOP w6: v1(2078.36,-3520.04) 2078.36,-3453.74 2110.83,-3421.26 R68.1
  L10-BOT w6: P2.A11 1895.51,-3820.18 2078.36,-3637.33 v1(2078.36,-3520.04)
NetP2_B17: P2.B17 R23.2 | length 1964.1
  L01-TOP w8: R23.2 1659.44,-3609.06 1745.48,-3695.11 v1(1745.48,-3698.82) ; P2.B17 2210.47,-3862.91 2359.32,-3714.07 v1(2422.45,-3714.07)
  L10-BOT w8: v1(1745.48,-3698.82) 1953.01,-3698.82 2056.74,-3595.09 2056.74,-3431.74 2171.29,-3317.19 2363.27,-3317.19 2406.53,-3360.45 2428.4,-3360.45 2505.97,-3438.02 2505.97,-3549.21 2460.69,-3594.49 2460.69,-3675.83 v1(2422.45,-3714.07)
NetP2_B31: P2.B31 R24.2 | length 2040.9
  L01-TOP w7.27: R24.2 1661.48,-3651.41 1698.66,-3688.59 v1(1698.66,-3698.82) ; v1(2480.38,-3712.24) 2661.06,-3712.24 2736.28,-3787.46 2736.28,-3888.44 2761.65,-3913.81 P2.B31
  L10-BOT w7.27: v1(1698.66,-3698.82) 1732.12,-3665.35 1865.3,-3665.35 2025.23,-3505.43 2025.23,-3429.6 2163.28,-3291.55 2399.26,-3291.55 2461.39,-3353.68 2461.39,-3364.63 2461.39,-3375.58 2558.19,-3472.37 2558.19,-3634.43 v1(2480.38,-3712.24)
NetR1_1: R1.1 U1.5 | length 149.3
  L01-TOP w10: R1.1 1050.26,-3454.14 1083.14,-3421.26 U1.5
NetR2_1: R2.1 R6.2 U1.4 | length 212.2
  L01-TOP w10: R2.1 1013.96,-3319.32 1013.96,-3390.85 R6.2 1068.33,-3391.27 1075.73,-3383.86 U1.4
P3V3_PCIE: P2.A9 P2.A10 P2.B8 | length 454.8
  L01-TOP w20: P2.B8 1777.4,-3898.6 1792.29,-3883.72 v1(1816.77,-3883.72)
  L10-BOT w20: P2.A9 v1(1816.77,-3883.72) 1844.42,-3883.72 1856.14,-3895.43 P2.A10
P5V: C7.1 C8.1 C9.1 C10.1 C11.1 C12.1 C13.1 C14.1 C15.1 D1.2 J1.1 J1.2 L1.1 R2.2 R3.2 R4.2 R5.2 | length 1454.9
  L01-TOP w6: 1989.98,-3449.95 2019.67,-3449.95 2025.23,-3455.51 2025.23,-3516.31 2071.91,-3563 2127.47,-3563 R5.2 R3.2
  L01-TOP w20: R2.2 911.64,-3318.9 899.92,-3330.62 899.92,-3538.53 960.61,-3599.22 1484.41,-3599.22 1520.63,-3563 1568.83,-3563 1580.55,-3551.28 1580.55,-3452.54 L1.1
  other v1: 1940.99,-3431.74 1978.94,-3432.42 1941.08,-3409.86 1978.94,-3409.86 2505.97,-3384.59 2538.84,-3385.49 2505.97,-3357.03 2538.23,-3356.19
PCIE_CLK_N: J1.5 P2.A14 | length 970.3
  L01-TOP w5: J1.5 2443.35,-3318.03 2443.35,-3439.21
  L10-BOT w5: P2.A14 cw(c2120.12,-3986.5) 2080.86,-3986.5 2080.86,-3932.02 cw(c2082.51,-3930.37) 2080.18,-3930.37 2080.18,-3870.63 ccw(c2028.71,-3870.63) 2065.1,-3834.24 2062.06,-3831.19 cw(c2097.8,-3795.45) 2047.26,-3795.45 2047.26,-3767.09 cw(c2147.26,-3767.09) 2076.54,-3696.38 2337.15,-3435.77 cw(c2399.29,-3497.91) 2399.29,-3410.03 2413.07,-3410.03 cw(c2413.07,-3437.78) 2432.69,-3418.16 2441.28,-3426.75 ; v1(2440.35,-3447.64) 2440.53,-3447.46 ccw(c2435.9,-3442.82) 2442.45,-3442.82 2442.45,-3440.74 cw(c2443.98,-3440.74) 2442.9,-3439.66 ccw(c2441.82,-3438.58) 2443.35,-3438.58 2443.35,-3431.74 ccw(c2436.3,-3431.74) 2441.29,-3426.76
PCIE_CLK_P: J1.4 P2.A13 | length 1017.4
  L01-TOP w5: 2458.35,-3439.21 2458.35,-3318.03 J1.4
  L10-BOT w5: P2.A13 ccw(c2025.23,-3986.5) 2064.49,-3986.5 2064.49,-3932.02 ccw(c2062.84,-3930.37) 2065.18,-3930.37 2065.18,-3870.72 ccw(c2028.5,-3870.72) 2054.43,-3844.78 2051.4,-3841.75 cw(c2097.61,-3795.53) 2032.26,-3795.53 2032.26,-3766.99 cw(c2147.02,-3766.99) 2065.87,-3685.84 2326.57,-3425.14 cw(c2399.26,-3497.84) 2399.26,-3395.03 2413.12,-3395.03 cw(c2413.12,-3437.65) 2443.26,-3407.51 2451.93,-3416.19 cw(c2436.44,-3431.68) 2458.35,-3431.68 2458.35,-3438.58 ccw(c2459.88,-3438.58) 2458.8,-3439.66 cw(c2457.72,-3440.74) 2459.24,-3440.74 2459.24,-3442.82 ccw(c2465.8,-3442.82) 2461.16,-3447.46 v1(2461.35,-3447.64)
PCIE_GF_PI_0_N: J1.11 P2.B15 | length 923.3
  L01-TOP w5: 2119.99,-3838.69 ccw(c2121.07,-3839.77) 2119.55,-3839.77 2119.55,-3930.37 ccw(c2121.88,-3930.37) 2120.23,-3932.02 2120.23,-3986.5 ccw(c2159.49,-3986.5) P2.B15 ; v1(2156,-3704.95) ccw(c2156,-3694.71) 2163.24,-3701.95 2295.95,-3569.25 ccw(c2225.24,-3498.54) 2325.24,-3498.54 2325.24,-3321.35 ccw(c2317.24,-3321.35) J1.11
  L10-BOT w5: v1(2122.55,-3830.71) 2122.36,-3830.52 cw(c2126.99,-3825.89) 2120.44,-3825.89 2120.44,-3823.81 ccw(c2118.91,-3823.81) 2119.99,-3822.73 cw(c2121.07,-3821.65) 2119.55,-3821.65 cw(c2153.54,-3821.65) 2129.49,-3797.62 2131.93,-3795.19 cw(c2157.53,-3820.79) 2157.53,-3784.58 2188.72,-3784.58 ccw(c2188.72,-3748.98) 2213.89,-3774.15 2213.97,-3774.08 ccw(c2179.86,-3739.97) 2228.1,-3739.97 2228.1,-3713.57 ccw(c2209.3,-3713.57) 2222.59,-3700.28 2214.93,-3692.62 ccw(c2192.15,-3715.4) 2192.15,-3683.18 2192.04,-3683.18 ccw(c2192.04,-3707.39) 2174.92,-3690.27 2164.53,-3700.67 cw(c2163.45,-3699.59) 2163.45,-3701.12 ccw(c2163.45,-3702.64) 2162.37,-3701.56 2161.08,-3702.85 cw(c2156,-3697.77) v1(2156,-3704.95)
PCIE_GF_PI_0_P: J1.10 P2.B14 | length 899.7
  L01-TOP w5: P2.B14 ccw(c2064.6,-3986.5) 2103.86,-3986.5 2103.86,-3932.02 ccw(c2102.21,-3930.37) 2104.55,-3930.37 2104.55,-3839.77 ccw(c2103.02,-3839.77) 2104.1,-3838.69 ; v1(2170.85,-3719.8) cw(c2181.09,-3719.8) 2173.85,-3712.56 2306.62,-3579.78 ccw(c2225.48,-3498.64) 2340.24,-3498.64 2340.24,-3321.35 cw(c2348.24,-3321.35) J1.10
  L10-BOT w5: v1(2101.55,-3830.71) 2101.73,-3830.52 ccw(c2097.1,-3825.89) 2103.65,-3825.89 2103.65,-3823.81 cw(c2105.18,-3823.81) 2104.1,-3822.73 ccw(c2103.02,-3821.65) 2104.55,-3821.65 ; 2104.55,-3821.62 cw(c2153.46,-3821.62) 2118.87,-3787.03 2121.34,-3784.56 cw(c2157.5,-3820.72) 2157.5,-3769.58 2188.69,-3769.58 ccw(c2188.69,-3748.9) 2203.31,-3763.52 ccw(c2179.68,-3739.9) 2213.1,-3739.9 2213.1,-3713.63 ccw(c2209.17,-3713.63) 2211.95,-3710.86 2204.37,-3703.27 ccw(c2192.08,-3715.56) 2192.08,-3698.18 ccw(c2192.08,-3707.5) 2185.51,-3700.9 2175.13,-3711.27 ; v1(2170.85,-3719.8) cw(c2178.03,-3719.8) 2172.95,-3714.72 2174.24,-3713.44 ccw(c2173.16,-3712.36) 2174.69,-3712.36 cw(c2176.22,-3712.36) 2175.13,-3711.28
PCIE_PERST: J1.16 R68.2 | length 191
  L01-TOP w6: R68.2 2190.63,-3421.26 2206.21,-3436.84 2223.1,-3436.84 v1(2223.21,-3436.95) 2224.47,-3435.69 J1.16
PCIE_PI_GF_0_N: J1.8 P2.A17 | length 881.6
  L01-TOP w5: 2369.71,-3585.22 ccw(c2369.71,-3583.69) 2370.79,-3584.77 2377.32,-3578.25 ccw(c2360.49,-3561.41) 2384.29,-3561.41 2384.29,-3321.35 ccw(c2376.3,-3321.35) J1.8
  L10-BOT w5: P2.A17 cw(c2238.23,-3986.5) 2198.97,-3986.5 2198.97,-3932.02 cw(c2200.62,-3930.37) 2198.29,-3930.37 2198.29,-3922.93 cw(c2285.67,-3922.93) 2223.88,-3861.14 2256.6,-3828.43 ccw(c2175.45,-3747.28) 2290.21,-3747.28 2290.21,-3612.28 cw(c2360.65,-3612.28) 2310.84,-3562.47 cw(c2350.44,-3602.07) 2350.44,-3546.07 2353.84,-3546.07 cw(c2353.84,-3572.16) 2372.29,-3553.71 2380.03,-3561.45 ; v1(2362.27,-3589.06) 2362.53,-3589.06 ccw(c2362.53,-3582.51) 2367.16,-3587.14 2368.63,-3585.67 cw(c2369.71,-3586.75) 2369.71,-3585.22 ccw(c2369.71,-3583.69) 2370.79,-3584.77 2375.75,-3579.81 ccw(c2361.41,-3565.47) 2381.7,-3565.47 ccw(c2376.02,-3565.47) 2380.04,-3561.46
PCIE_PI_GF_0_P: J1.7 P2.A16 | length 952.9
  L01-TOP w5: 2380.95,-3596.46 cw(c2382.48,-3596.46) 2381.4,-3595.38 2390.12,-3586.66 ccw(c2367.99,-3564.52) 2399.29,-3564.52 2399.29,-3321.35 cw(c2407.29,-3321.35) J1.7
  L10-BOT w5: P2.A16 ccw(c2143.34,-3986.5) 2182.6,-3986.5 2182.6,-3932.02 ccw(c2180.95,-3930.37) 2183.29,-3930.37 2183.29,-3922.82 cw(c2285.38,-3922.82) 2213.19,-3850.62 2245.92,-3817.89 ccw(c2175.21,-3747.18) 2275.21,-3747.18 2275.21,-3612.23 cw(c2360.52,-3612.23) 2300.2,-3551.9 2300.3,-3551.8 cw(c2350.35,-3601.85) 2350.35,-3531.07 2356.66,-3531.07 cw(c2356.66,-3565.36) 2380.9,-3541.11 2390.68,-3550.89 cw(c2376.16,-3565.41) 2396.7,-3565.41 2396.7,-3565.54 cw(c2361.58,-3565.54) 2386.41,-3590.37 2381.4,-3595.38 ccw(c2382.48,-3596.46) 2380.95,-3596.46 cw(c2379.43,-3596.46) 2380.51,-3597.54 2379.03,-3599.01 ccw(c2383.67,-3603.65) 2377.11,-3603.65 v1(2377.11,-3603.91)
PRSNT: P2.A1 R23.1 R24.1 | length 454.3
  L01-TOP w5: v1(1501.81,-3811.02) 1501.81,-3686.79 1537.19,-3651.41 R24.1
  L01-TOP w7.27: R24.1 R23.1
  L10-BOT w5: P2.A1 v1(1501.81,-3811.02)
pads on no net: P2.A5 P2.A6 P2.A7 P2.A8 P2.A19 P2.A21 P2.A22 P2.A25 P2.A26 P2.A29 P2.A30 P2.A32 P2.B5 P2.B6 P2.B9 P2.B10 P2.B11 P2.B12 P2.B19 P2.B20 P2.B23 P2.B24 P2.B27 P2.B28 P2.B30

## Polygon pours and split planes (outlines as drawn)
GND on L01-TOP "NONET_L01_P-001" (solid, remove dead copper, pour order 9): -280.43,-3175.95 -280.43,-3053.8 2881.61,-3053.8 2881.61,-3918.39 497.83,-3918.39 497.83,-3969.9 -280.43,-3969.9 -280.43,-3391.1
P5V on L01-TOP "NONET_L01_P-001" (solid, remove dead copper, pour order 0): 2494.16,-3299.94 2494.16,-3415.49 2590.17,-3415.49 2590.17,-3318.03 2525.65,-3318.03 2525.65,-3299.94
P5V on L01-TOP "NONET_L01_P-001" (solid, remove dead copper, pour order 4): 1626.05,-3376.82 1637.02,-3365.85 1689.75,-3365.85 1694.71,-3370.81 1744.77,-3370.81 1747.33,-3373.37 1930.02,-3373.37 1939.52,-3363.87 2011.12,-3363.87 2011.12,-3490.95 1924.12,-3490.95 1920.3,-3487.13 1744.15,-3487.13 1739.85,-3482.84 1632.38,-3482.84 1631.44,-3481.9 1602,-3481.9 1597.24,-3486.66 1522.24,-3486.66 1522.24,-3376.82
+12V_PCIE on L01-TOP "NONET_L01_P-001" (solid, remove dead copper, pour order 2): 1349.03,-3096.34 1244.87,-3096.34 1205.15,-3136.05 1207.12,-3138.01 1207.12,-3291.55 1224.63,-3309.05 1224.63,-3362.86 1211.03,-3376.45 1211.03,-3386.93 1218.44,-3394.34 1280.3,-3394.34 1295.02,-3379.61 1295.02,-3341.05 1342.74,-3293.33 1342.74,-3182.09 1349.03,-3175.8 1349.03,-3163.51
P5V on L10-BOT "NONET_L01_P-001" (solid, remove dead copper, pour order 3): 2007.94,-3467.33 2007.94,-3417.67 2153.96,-3271.65 2418.41,-3271.65 2481.85,-3335.09 2481.85,-3384.59 2522.29,-3425.03 2590.17,-3425.03 2643.54,-3371.66 2643.54,-3286.41 2487.05,-3129.92 2016.28,-3129.92 1839.72,-3306.49 1839.72,-3466.99 1977.27,-3466.99
GND on L10-BOT "NONET_L01_P-001" (solid, remove dead copper, pour order 8): -280.43,-3175.95 -280.43,-3053.8 2881.61,-3053.8 2881.61,-3918.39 497.83,-3918.39 497.83,-3969.9 -280.43,-3969.9 -280.43,-3391.1
+12V_PCIE on L10-BOT "NONET_L01_P-001" (solid, remove dead copper, pour order 7): 1527.18,-3883.07 1599.62,-3883.07 1599.62,-3235.24 1195.31,-3235.24 1195.31,-3409.45 1515.81,-3409.45 1515.81,-3882.93
GND on L02-GND "NONET_L01_P-001" (solid, remove dead copper, pour order 5): -280.43,-3175.95 -280.43,-3053.8 2881.61,-3053.8 2881.61,-3918.39 497.83,-3918.39 497.83,-3969.9 -280.43,-3969.9 -280.43,-3391.1
GND on L03-GND "NONET_L01_P-001" (solid, remove dead copper, pour order 6): -280.43,-3175.95 -280.43,-3053.8 2881.61,-3053.8 2881.61,-3918.39 497.83,-3918.39 497.83,-3969.9 -280.43,-3969.9 -280.43,-3391.1

## Keep-outs
Keep-Out Layer:
  rectangle: 1027.56,-3974.9 1342.52,-3839.07

## Other copper
L02-GND:
  pour cut-out: 1471.79,-4160.92 1471.79,-3921.75 2839.9,-3921.75 2839.9,-4170.76

## Silkscreen, mask and mechanical layers (free items; w line width, h text height)
Top Overlay:
Top Solder:
  rectangle: 1027.56,-3974.9 1342.52,-3839.07
  rectangle: 1484.25,-4156 2838.58,-3925.68
Board Layer Stack Bottom Solder:
  rectangle: 1027.56,-3974.9 1342.52,-3839.07
  rectangle: 1484.25,-4156 2838.58,-3925.68
OUTLINE:
  lines w3.94: 1342.09,-3720.99 cw(c1413.94,-3720.99) 1485.79,-3720.99
DIMENSION:
  lines w1: 4579.54,-886.58 4595.28,-870.83 ; 4579.54,-1264.83 4973.54,-1264.83 4973.54,-870.83 4579.54,-870.83 4579.54,-1264.83
  text "1" at 4628.31,-845.83 h50 r90
  text "12" at 4974.76,-845.83 h50 r90
  text "A" at 4529.54,-919.58 h50
  text "M" at 4529.54,-1266.08 h50
MECH_DIMENSION:
  region: 4983.54,-1274.83 4569.54,-1274.83 4569.54,-860.83 4983.54,-860.83
  lines w6: 4569.54,-1274.83 4569.54,-860.83 4983.54,-860.83 4983.54,-1274.83 4569.54,-1274.83
Board Shape:
  lines w10: -234.59,-3053.8 2834.93,-3053.8 cw(c2835.77,-3099.64) 2881.61,-3098.8 2881.61,-3605.1 cw(c2831.61,-3605.09) 2831.61,-3655.09 2831.61,-4132.38 ; -233.75,-3053.8 ccw(c-234.59,-3099.64) -280.43,-3098.8 -280.43,-3909.9 ccw(c-225.43,-3914.9) -230.43,-3969.9 350.12,-3969.9 ccw(c350.12,-3919.9) 400.12,-3919.9 400.12,-3650.09 ; 1032.44,-3905.99 ccw(c1096.47,-3905.99) 1096.47,-3970.02 ; 1032.56,-3905.99 1032.56,-3650.09 ; 1096.47,-3969.9 1273.49,-3969.9 ; 1273.49,-3969.54 ccw(c1273.49,-3905.51) 1337.52,-3905.51 1337.52,-3721.94 cw(c1404.42,-3721.94) 1471.31,-3721.94 ; 1471.22,-3721.98 1471.22,-4134.45 1492.35,-4155.58 ; 1495.9,-4157.06 1888.61,-4157.06 1896.55,-4157.06 1917.7,-4135.91 ; 1919.18,-4132.36 1919.18,-3858.74 cw(c1954.58,-3858.74) 1989.98,-3858.74 1989.98,-4134.43 2011.12,-4155.56 ; 2011.65,-4157.06 2806.93,-4157.06 ; 2830.15,-4135.91 2830.13,-4135.93 2810.48,-4155.58 ; 400.12,-3650.09 cw(c405.12,-3650.09) 405.12,-3645.09 ; 400.12,-3650.09 cw(c405.12,-3650.09) 405.12,-3645.09 ; 405.12,-3645.09 1027.56,-3645.09 ; 1027.56,-3645.09 cw(c1027.56,-3650.09) 1032.56,-3650.09 ; 1027.56,-3645.09 cw(c1027.56,-3650.09) 1032.56,-3650.09 ; 1492.35,-4155.58 1492.37,-4155.6 ; 2810.46,-4155.6 2810.48,-4155.58

## Dimensions
1471.31,-3721.94 to -230.43,-3969.9 on PLACE_BOUND_BOTTOM
400.12,-3919.9 to 6311.02,212.6 on PLACE_BOUND_BOTTOM